# Altium PCB host_board.PcbDoc (part 2 of 3)
Units mm, origin at the board's own origin, x right, y up, seen from the top; angles counter-clockwise.
Board outline 82.44 x 55.58 mm, 4 copper layers (Top Layer, GND, Power, Bottom Layer), stack 1.594 mm thick; 220 components, 249 nets, 1076 pads, 228 vias.
Unrouted connection lines stored in the file: 688.
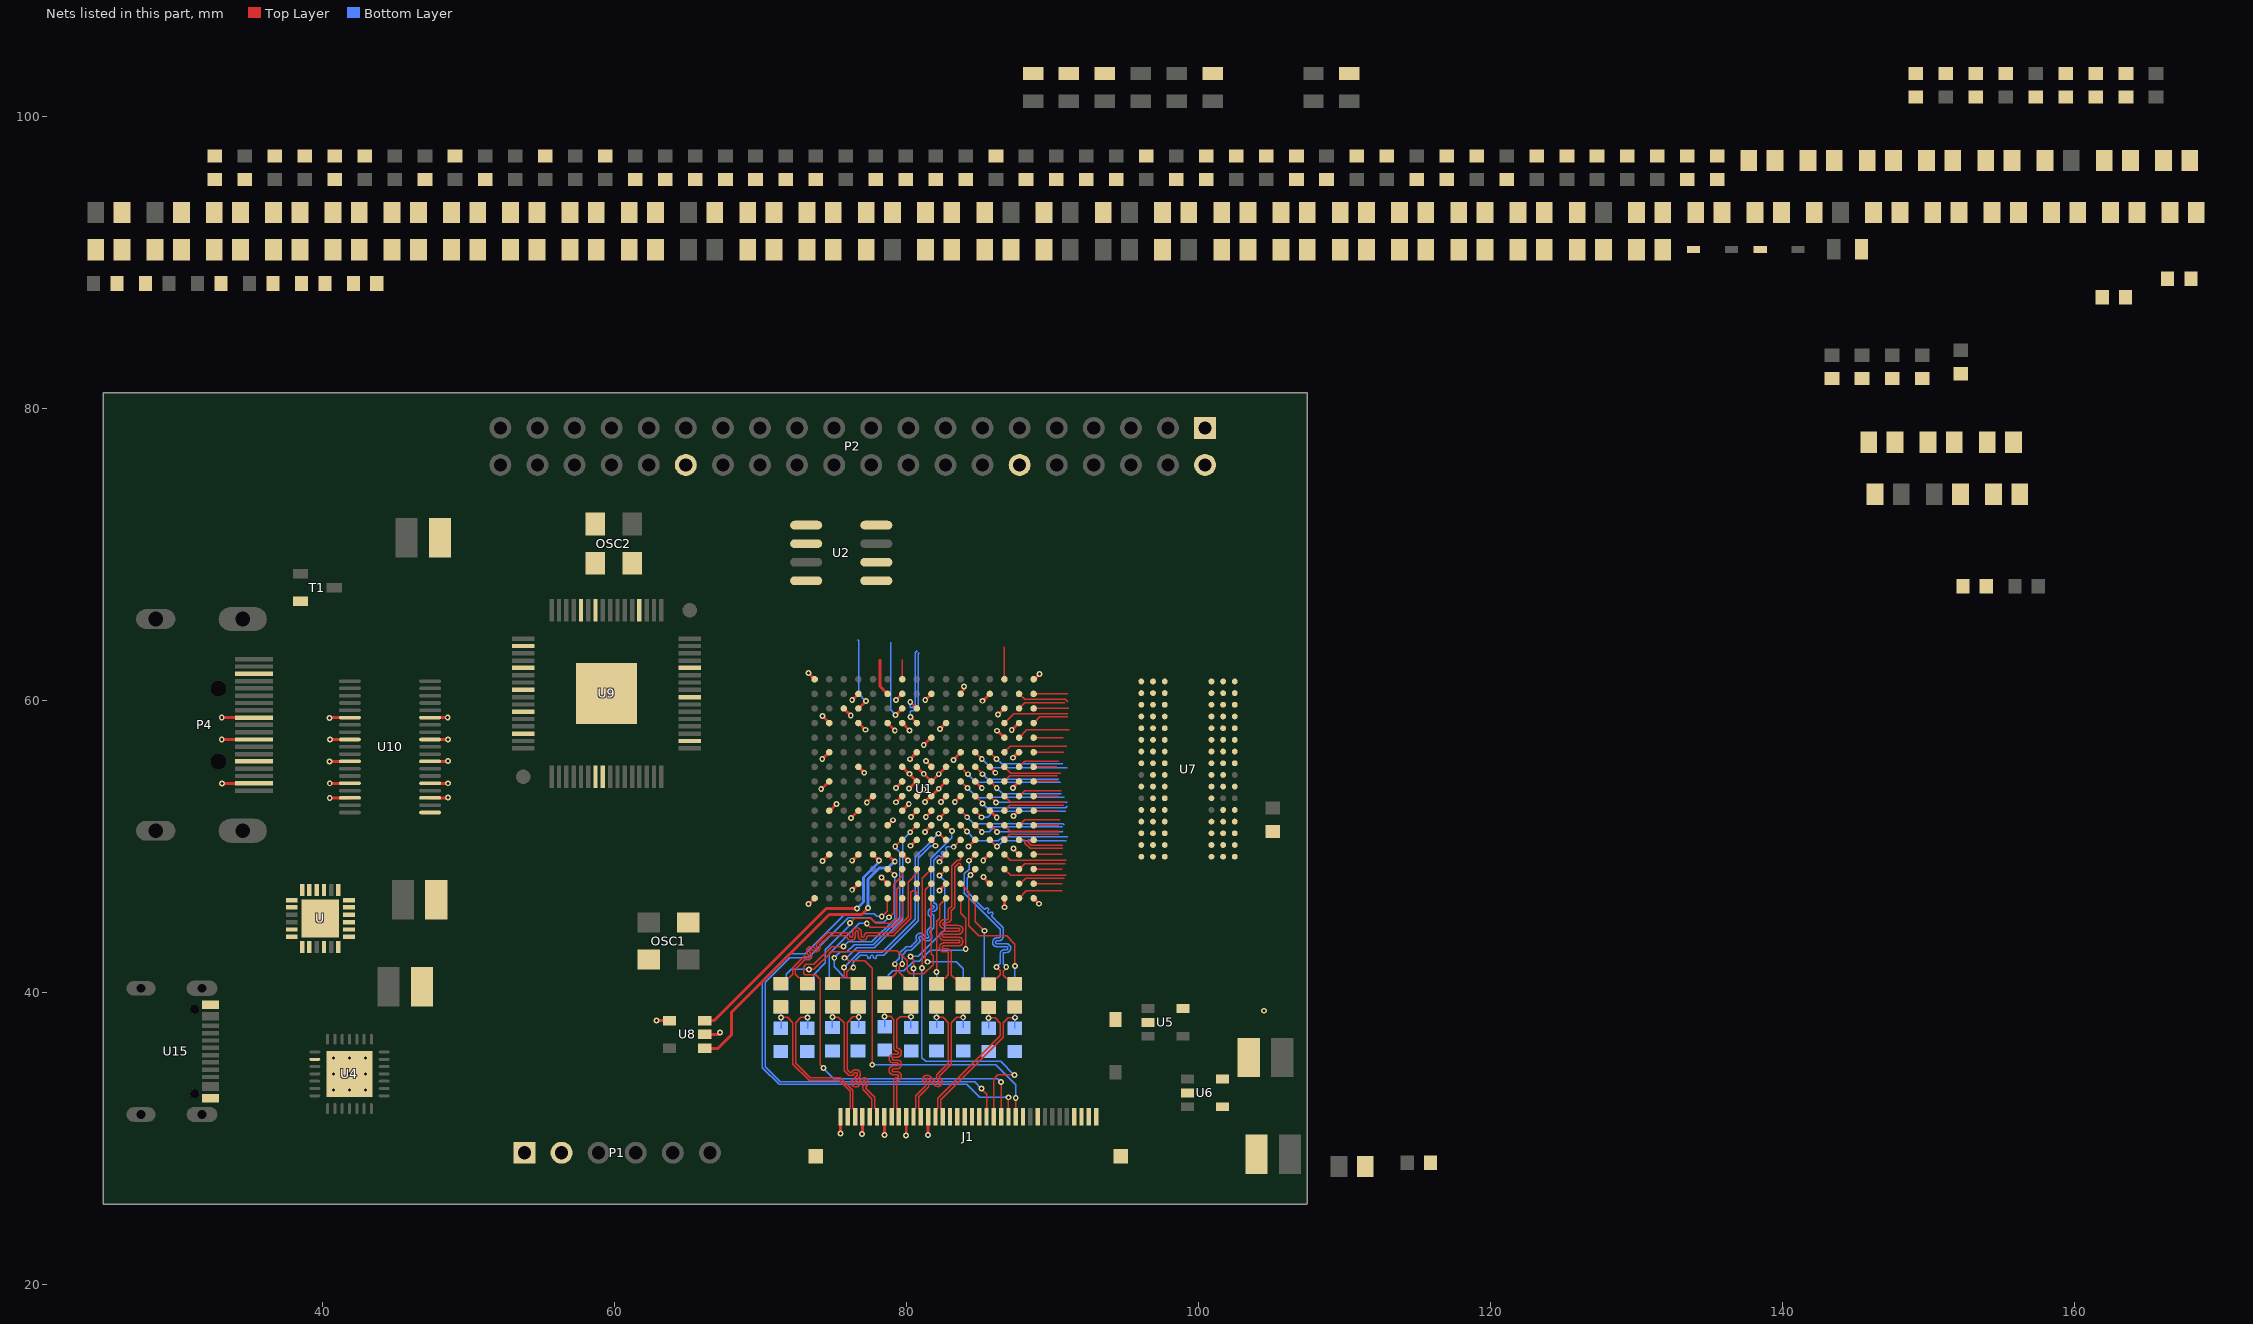
[diagram p4: the nets of this part, all layers, seen from the top]

## Part data
C1 C2 C3 C4 C5 C6 C7 C8 C9 C10 C11 C12 C13 C14 C15 C16 C17 C18 C19 C20 C21 C22 C23 C24 C25 C26 C27 C28 C29 C30 C32 C33 C34 C35 C36 C39 C40 C41 C42 C43 C44 C45 C46 C47 C48 C49 C50 C51 C52 C53 C54 C55 C56 C57 C58 C59 C60 C61 C62 C63 C64 C65 C66 C67 C68 C69 C70 C71 C72 C73 C74 C75 C76 C77 C78 C79 C? C?: library part CC0805_1.5NF_50V_5%_C0G, "Non-polarised capacitor", Case=0805, Manufacturer=GENERIC, Manufacturer1 ComponentHeight=1mm, Manufacturer1 Example=KEMET, Manufacturer1 Part Number=C0805C152J5GACTU, Tolerance=±5%, Voltage=50V, Author="CERN DEM BC", Component Type=Standard, CreateDate=18.11.2015, HelpURL="\\cern.ch\dfs\Applications\Altium\Datasheets\CC0805_C0G_KEMET_(Commercial Grade).pdf", LatestRevisionDate=18.11.2015, Manufacturer Part Number=CC0805_1.5NF_50V_5%_C0G, Mounted=Yes, Part Description="SMD Multilayer Chip Ceramic Capacitor", Part Number=CC0805_1.5NF_50V_5%_C0G, Pin Count=2, Sense=No, SMD=Yes, Socket=No, Status=Preferred, TC=C0G/NP0
D1 D8: "Diode", Case=SOD323, Manufacturer="NXP SEMICONDUCTORS", Power=200mA, Voltage=75V, Author="CERN DEM JLC", Bonding=No, ComponentHeight=1.1mm, Component Type=Standard, CreateDate=01.10.2013, Device=BAS416, HelpURL=\\cern.ch\dfs\Applications\Altium\Datasheets\BAS416.pdf, LatestRevisionDate=01.10.2013, Manufacturer Part Number=BAS416, Mounted=Yes, PackageDescription="Small Outline Diode Flat Lead (SOD-323), 1.70mm W X 1.25mm L X 1.10mm H body,  IPC Medium Density", Part Description="Low-Leakage Diode", Part Number=BAS416, Pin Count=2, PressFit=No, Sense=No, SMD=Yes, Socket=No
D7: "Zener Diode", Case=SOD123, Manufacturer="DIODES INCORPORATED", Power=500mW, Voltage=2V7, Author="CERN DEM JLC", Bonding=No, ComponentHeight=1.45mm, Component Type=Standard, CreateDate=02.03.2015, Device=BZT52C2V7, HelpURL=\\cern.ch\dfs\Applications\Altium\Datasheets\BZT52C2V7.pdf, LatestRevisionDate=02.03.2015, Manufacturer Part Number=BZT52C2V7, Mounted=Yes, PackageDescription="SOD Diode (SOD123); 2.70mm W X 1.55mm L X 1.45mm H body, IPC Medium Density", Part Description="Surface Mount Zener Diode", Part Number=BZT52C2V7, Pin Count=2, PressFit=No, Sense=No, SMD=Yes, Socket=No
J1: "0.5 mm Pitch Easy-On(TM) Type FPC Connector, 2.0 mm Mated Height, Right Angle, ZIF, SMT, Top Contact, 36 Circuits, -40 to 85 degC, ELV and RoHS Compliant, Tape and Reel", Current (Max per Contact)=0.5A, Manufacturer=Molex, Supplier Part Number 1=538-54104-3633, Voltage (Max)=50V, Circuits (Loaded)=36, ComponentLink1Description="Manufacturer URL", ComponentLink1URL=http://www.molex.com/molex/index.jsp, ComponentLink2Description=Datasheet, ComponentLink2URL=http://www.molex.com/webdocs/datasheets/pdf/en-us/0541043633_FFC_FPC_CONNECTORS.pdf, ComponentLink3Description="Package Specification", ComponentLink3URL=http://www.molex.com/pdm_docs/sd/541043633_sd.pdf, Contact Position=Top, Durability (mating cycles max)=20, Entry Angle="90degrees Angle", Mated Height=2.00mm, Material - Metal="Phosphor Bronze", Material - Plating Mating="Silver, Tin-Bismuth", Material - Plating Termination="Silver, Tin-Bismuth", Mounting Technology="Surface Mount", Number of Rows=1, Orientation="Right Angle", PackageDescription="36-Lead FPC Connector, Pitch 0.5 mm", PackageReference=54104-3633, PackageVersion="Rev. C, 04/2014", Packing="Tape and Reel", PartNumber=54104-3633, PCB Locator=No, PCB Retention=None, Pitch - Mating Interface=0.50mm, Pitch - Termination Interface=0.50mm, Polarized to PCB=Yes, RoHS=TRUE, Stackable=No, Supplier 1=Mouser
L1 L2 L3 L4 L5: library part IND_22UH_10%_MURATA-PS_8200, "Inductor With Core", Manufacturer="MURATA POWER SOLUTIONS", Manufacturer Part Number=82223C, Power=320mA, Resistance=0.92R, Tolerance=±10%, Author="CERN DEM JMW", ComponentHeight=2.3mm, Component Type=Standard, CreateDate=07.10.2015, HelpURL=\\cern.ch\dfs\Applications\Altium\Datasheets\IND_MURATA-PS_8200.pdf, LatestRevisionDate=07.10.2015, Mounted=Yes, Part Description="Miniature Surface Mount Power Inductor (8200 Series)", Part Number=IND_22UH_10%_MURATA-PS_8200, Pin Count=2, Sense=No, SMD=Yes, Socket=No, Status=None
LD1 LD2 LD3 LD4 LD5 LD6 LD7 LD8 LD9: library part LED_OSRAM_LSR976, "LED Red 1C 2A", Case=0805, Manufacturer=OSRAM, Manufacturer Part Number=LSR976, Author="CERN DEM JLC", Bonding=No, Color="Super Red", ComponentHeight=0.9mm, Component Type=Standard, CreateDate=18.05.2010, HelpURL=\\cern.ch\dfs\Applications\Altium\Datasheets\LED_OSRAM_LSR976.pdf, LatestRevisionDate=18.05.2010, Mounted=Yes, PackageDescription="Super Red Chip LED, 2-Leads, Body 2 x1.25mm, IPC Medium Density", Part Description="Surface Mount Super Red LED (0805 Case)", Part Number=LED_OSRAM_LSR976, Pin Count=2, PressFit=No, Sense=No, SMD=Yes, Socket=No
OSC1 OSC2: library part OSC_50MHZ_IQD_LFSPXO009592, "Oscillator 4 pins 1=E 2=GND 3=OUT 4=+Vs", Manufacturer="IQD FREQUENCY PRODUCTS", Manufacturer Part Number=LFSPXO009592, Author="CERN DEM JLC", Bonding=No, ComponentHeight=0.95mm, Component Type=Standard, CreateDate=16.03.2010, HelpURL=\\cern.ch\dfs\Applications\Altium\Datasheets\OSC_IQD_LFSPXO009592.pdf, LatestRevisionDate=07.11.2016, Mounted=Yes, PackageDescription="Oscillator, Side Concave, 2.54mm Pitch, 4 Pins, 3.20mm L X 5.00mm W X 1.00mm H, CFPS-69 Series", Part Description="3.3V, ±50ppm,  -40..85°C, CMOS Surface Mount Clock Oscillator, Low Current (CFPS-69 Series)", Part Number=OSC_50MHZ_IQD_LFSPXO009592, Pin Count=4, PressFit=No, Sense=No, SMD=Yes, Socket=No
P1: "Header, 6-Pin", LatestRevisionDate=17-Jul-2002, LatestRevisionNote="Re-released for DXP Platform.", Publisher="Altium Limited"
P2: library part "Header 20X2", "Header, 20-Pin, Dual row", LatestRevisionDate=17-Jul-2002, LatestRevisionNote="Re-released for DXP Platform.", Publisher="Altium Limited"
P4: "EMBOSS PACKAGE HDMI CONN SMT NO-FLANGE T", Package=None, Availability=Unavailable, EU_RoHS_Compliance=Compliant, MF="TE Connectivity", MP=1827059-3, Price=None, SnapEDA_Link=https://www.snapeda.com/parts/1827059-3/TE%20Connectivity%20AMP%20Connectors/view-part/1316486/?ref=snap, TE_purchase_URL=https://www.te.com/usa-en/product-1827059-3.html?te_bu=Cor&te_type=disp&te_campaign=seda_glo_cor-seda-global-disp-prtnr-fy19-seda-model-bom-cta_sma-317_1&elqCampaignId=32493
R1 R1 R1 R1 R1 R2 R2 R2 R2 R2 R3 R3 R3 R3 R3 R4 R4 R4 R4 R4 R5 R5 R5 R5 R5 R6 R6 R6 R6 R6 R7 R8 R9 R10 R11 R12 R13 R14 R15 R16 R17 R18 R19 R20 R21 R22 R23 R24 R25 R26 R27 R28 R29 R30 R31 R32 R33 R34 R35 R36 R37 R38 R39 R40 R41 R42 R43 R44 R45 R46 R47 R48 R49 R50 R51 R52 R53 R54 R55 R56 R57 R58 R59 R60 R61 R62 R63 R64 R65 R66 R67 R68 R69 R70 R71 R72 R73 R74 R75 R76 R77 R78 R79 R80 R81 R82 R?: library part R0603_100K_1%_0.1W_100PPM, "Resistor - 1%", Case=0603, Manufacturer=GENERIC, Manufacturer1 ComponentHeight=0.55mm, Manufacturer1 Example="NIC COMPONENT", Manufacturer1 Part Number=NRC06F1003TRF, Power=0.1W, Tolerance=±1%, Author="CERN DEM JLC", Component Type=Standard, CreateDate=03.12.2007, HelpURL=\\cern.ch\dfs\Applications\Altium\Datasheets\R0603_NIC_NRC.pdf, LatestRevisionDate=13.03.2008, Manufacturer Part Number=R0603_100K_1%_0.1W_100PPM, Mounted=Yes, Part Description="General Purpose Thick Film Chip Resistor", Part Number=R0603_100K_1%_0.1W_100PPM, Pin Count=2, PressFit=No, Sense=No, SMD=Yes, Socket=No, Status=Preferred, TC=±100ppm/°C
T1: "N-CHANNEL MOSFET WITH DIODE", Case=SOT23-3, Manufacturer="FAIRCHILD SEMICONDUCTOR", Author="CERN DEM JLC", Bonding=No, ComponentHeight=1.3mm, Component Type=Standard, CreateDate=20.08.2008, Device=2N7002, HelpURL=\\cern.ch\dfs\Applications\Altium\Datasheets\2N7002.pdf, LatestRevisionDate=07.04.2009, Manufacturer Part Number=2N7002, Mounted=Yes, PackageDescription="SOT23 3-Leads, Pitch 0.95mm - Body 1.3x2.9mm, IPC Medium Density", Part Description="60V 280mA N-Channel Enhancement Mode Field Effect Transistor (FET)", Part Number=2N7002, Pin Count=3, PressFit=No, Sense=No, SMD=Yes, Socket=No
U: "PMIC - Voltage Regulators - Linear + Switching 4 Output Step-Down _Buck_ Synchronous _2_, Linear _LDO_ _2_ 2MHz 24-WQFN _4x4_", Package="WQFN-24 Texas Instruments", Availability=Unavailable, MF="Texas Instruments", MP=LM26480SQ-AA, Price=None, SnapEDA_Link=https://www.snapeda.com/parts/LM26480SQ-AA/Texas%20Instruments/view-part/28484/?ref=snap
U1: "Spartan-6 LX 1.2V FPGA, 186 User I/Os, 256-Ball Fine-Pitch Thin BGA (1.0mm Pitch), Speed Grade 2, Commercial Grade, Pb-Free", Code_JEDEC=MS-034-AAF-1*, ComponentLink1Description="Manufacturer URL", ComponentLink1URL=http://www.xilinx.com/, ComponentLink2Description="Spartan-6 Datasheet", ComponentLink2URL=http://www.xilinx.com/support/documentation/data_sheets/ds160.pdf, ComponentLink3Description="Spartan-6 Documents", ComponentLink3URL=http://www.xilinx.com/support/documentation/spartan-6.htm, DatasheetVersion="ver1.6, Nov-2010", PackageDescription="256-Ball Fine Pitch Thin Ball Grid Array 1.00 mm Pitch (FTG256) - Pb-Free", PackageReference=FTG256, PackageVersion="ver1.3, Oct-2007"
U2: "8 Mb (x1) Serial NOR Flash Memory, 75 MHz, 2.7 to 3.6 V, 8-pin SO8 Narrow (MN), Tube", Manufacturer=Micron, Package="SO8 Narrow", Voltage=2.7V-3.6V, Applications=Embedded, ComponentLink1Description="Manufacturer URL", ComponentLink1URL=http://www.micron.com/, ComponentLink2Description=Datasheet, ComponentLink2URL=http://www.micron.com/~/media/Documents/Products/Data%20Sheet/NOR%20Flash/Serial%20NOR/M25P/M25P80.pdf, ComponentLink3Description="Package Specification", ComponentLink3URL=http://www.micron.com/~/media/Documents/Products/Data%20Sheet/NOR%20Flash/Serial%20NOR/M25P/M25P05A.pdf, DatasheetVersion="Rev. Y", Density=8Mb, Mounting Technology="Surface Mount", PackageDescription="8-Pin SO Narrow, 3.9 X 4.9 mm, Pitch 1.27 mm", PackageReference=MICT-MN-8, PackageVersion="Rev 11", Part Family=M25P, PartNumber=M25P80-VMN6P, Part Status=Production, RoHS=Yes, Speed="75 MHz", Type="Data Storage", Width=x1
U4: "Single-Chip USB to UART Bridge, 1024 Bytes EEPROM, -40 to 85 degC, 28-pin QFN, Tube", Manufacturer="Silicon Labs", Supplier Part Number 1=336-1164-ND, ComponentLink1Description="Manufacturer URL", ComponentLink1URL=http://www.silabs.com/, ComponentLink2Description=Datasheet, ComponentLink2URL=http://www.silabs.com/Support%20Documents/TechnicalDocs/CP2103.pdf, ComponentLink3Description="Package Specification", ComponentLink3URL=http://www.silabs.com/Support%20Documents/TechnicalDocs/C8051F35x.pdf, DatasheetVersion="Rev. 1.0", EEPROM="1024 Bytes", Internal Oscillator=TRUE, Mounting Technology="Surface Mount", PackageDescription="28-Pin Quad-Flat No-Leads Package, Body 5 x 5 mm, Pitch 0.5 mm", PackageReference=QFN-28, PartNumber=CP2103-GM, Sub-Family="USB Bridges", Supplier 1=Digi-Key, Supplier 2=Farnell, Supplier 3=Newark, Supplier 4=Mouser, Supplier Part Number 2=1291538, Supplier Part Number 3=24M1109, Supplier Part Number 4=634-CP2103-GM
U5 U6: "28 V, 400 mA Switch Boost Converter for White LED Applications, 1.8 to 6 V, -40 to 85 degC, 5-pin SOT23 (DBV5), Green (RoHS & no Sb/Br)", Manufacturer="Texas Instruments", Rating=Catalog, Supplier Part Number 1=296-12685-2-ND, Switching Frequency(Max)(kHz)=1000, Code_JEDEC=MO-178, ComponentLink1Description="Manufacturer URL", ComponentLink1URL=http://www.ti.com/, ComponentLink2Description=Datasheet, ComponentLink2URL=http://www.ti.com/general/docs/lit/getliterature.tsp?genericPartNumber=TPS61040&fileType=pdf, ComponentLink3Description="Package Specification", ComponentLink3URL=http://www.ti.com/litv/pdf/mpds018i, DatasheetVersion=SLVS413F, Dimming=TRUE, Eco-Plan="Green (RoHS & no Sb/Br)", Iout(Max)(A)=0.09, Iq(Typ)(mA)=0.028, Mounting Technology="Surface Mount", PackageDescription="5-Pin Plastic Small Outline, Body 1.60 × 2.90 mm, Pitch 0.95 mm", PackageReference=DBV5, PackageVersion=4073253-4/K, PartNumber=TPS61040DBVR, SubFamily="White LED Driver", Supplier 1=Digi-Key, Supplier 2=Digi-Key, Supplier 3=Digi-Key, Supplier 4=Farnell, Supplier 5=Farnell, Supplier 6=Newark, Supplier 7=Mouser, Supplier Part Number 2=296-12685-1-ND, Supplier Part Number 3=296-12685-6-ND, Supplier Part Number 4=1461061, Supplier Part Number 5=1461061RL, Supplier Part Number 6=35K1326, Supplier Part Number 7=595-TPS61040DBVR, Topology=Boost, Vin(Max)(V)=6, Vin(Min)(V)=1.8
U7: "4Gb DDR3-1600 SDRAM, 256Mb x 16, 1.25ns, 1.5V, 0 to 95 degC, 96-Ball FBGA, Pb-Free", Manufacturer=Micron, Op. Temp.="0C to +95C", Package=FBGA, Voltage=1.5V, CL="CL = 11", Clock Rate="800 MHz", ComponentLink1Description="Manufacturer URL", ComponentLink1URL=http://www.micron.com/, ComponentLink2Description=Datasheet, ComponentLink2URL=http://www.micron.com/~/media/Documents/Products/Data%20Sheet/DRAM/4Gb_DDR3_SDRAM.pdf, ComponentLink3Description="Package Specification", ComponentLink3URL=http://www.micron.com/~/media/Documents/Products/Data%20Sheet/DRAM/4Gb_1_35V_DDR3L.pdf, Cycle Time=1.25ns, Data Rate=DDR3-1600, DatasheetVersion=Rev.J, Density=4Gb, Depth=256Mb, Mounting Technology="Surface Mount", PackageDescription="96-Ball Fine-Pitch Ball Grid Array, 14 x 9 mm, Pitch 0.8 mm", PackageReference=MICT-HA-96, PackageVersion=Rev.E, PartNumber=MT41J256M16HA-125, Pin Count=96-ball, RoHS=Yes, Width=x16
U8: "2Kbit, 400kHz, 1.7V, I2C Serial EEPROM, 5-Pin SOT-23, Industrial Temperature, Tape and Reel", Manufacturer=Microchip, Supplier Part Number 1=24AA02HT-I/OT-ND, Code_IPC=SOT23-5, ComponentLink1Description="Manufacturer URL", ComponentLink1URL=http://www.microchip.com/, ComponentLink2Description=Datasheet, ComponentLink2URL=http://ww1.microchip.com/downloads/en/DeviceDoc/22105A.pdf, ComponentLink3Description="Package Specification", ComponentLink3URL=http://www.microchip.com/stellent/groups/techpub_sg/documents/packagingspec/en012702.pdf, DatasheetVersion="revA, Sep-2008", Mounting Technology="Surface Mount", PackageDescription="5-Lead Plastic Small Outline Transistor (OT) [SOT-23]", PackageReference=SOT-23-OT5, PackageVersion="revBB, Aug-2009", PartNumber=24AA02HT-I/OT, Supplier 1=Digi-Key, Supplier 2=Mouser, Supplier Part Number 2=579-24AA02HT-I/OT
U9: "Low Power 165 MHz HDMI Receiver"
U10: "HDMI Receiver Port Protection and Interface Device, 12 Channels, -40 to +85 degC, 38-pin TSSOP (DBT), Green (RoHS & no Sb/Br)", Breakdown Voltage(Min)(V)=9, Differential Capacitance(pF)=0.05, IO Capacitance(Typ)(pF)=0.9, Manufacturer="Texas Instruments", Supplier Part Number 1=296-23617-2-ND, Code_JEDEC=MO-153, ComponentLink1Description=Datasheet, ComponentLink1URL=http://www.ti.com/general/docs/lit/getliterature.tsp?genericPartNumber=TPD12S520&fileType=pdf, ComponentLink2Description="URL Link1", ComponentLink2URL=SamplesURL:http://www.ti.com/product/tpd12s520#samples, DatasheetVersion=SLVS640C, Eco-Plan="Green (RoHS & no Sb/Br)", IEC 61000-4-2 Contact(+/- kV)=8, IO Leakage Current(nA)=0.05, Mounting Technology="Surface Mount", PackageDescription="38-Pin Plastic Small Outline 0.5 mm Pitch", PackageReference=DBT38, PackageVersion="revI, Mar-2011", PartNumber=TPD12S520DBTR, SubFamily="ESD Solution", Supplier 1=Digi-Key, Supplier 2=Digi-Key, Supplier 3=Digi-Key, Supplier 4=Newark, Supplier 5=Mouser, Supplier Part Number 2=296-23617-1-ND, Supplier Part Number 3=296-23617-6-ND, Supplier Part Number 4=85M0176, Supplier Part Number 5=595-TPD12S520DBTR
U15: "USB-C _USB TYPE-C_ USB 2.0 Receptacle Connector 24 _16+8 Dummy_ Position Surface Mount, Right Angle; Through Hole", Package=None, Availability=Unavailable, MF=GCT, MP=USB4105-GF-A, Price=None, SnapEDA_Link=https://www.snapeda.com/parts/USB4105-GF-A/Global%20Connector%20Technology/view-part/4423780/?ref=snap

## Via types
v1: diameter 0.4, hole 0.2, Top Layer to Bottom Layer, tented both sides, 219 vias
v2: diameter 0.5, hole 0.2, Top Layer to Bottom Layer, 9 vias

## Nets (pads, with @x,y where several pads share a name; then routed paths per layer and width w, separated by ;. In a path a pad name is that pad's centre, name@x,y a point inside that pad or via, vN(x,y) a via of type N, cw(c..) or ccw(c..) an arc to the next point about the centre after c; other vN are vias at no path point)
1P5: C1.2 C2.2 C6.2 C7.2 C8.2 C9.2 C10.2 C11.2 C12.2 C13.2 R7.2 U7.A1 U7.A8 U7.B2 U7.C1 U7.C9 U7.D2 U7.D9 U7.E9 U7.F1 U7.G7 U7.H2 U7.H9 U7.K2 U7.K8 U7.N1 U7.N9 U7.R1 U7.R9
1V2: C50.2 C51.2 C52.2 C53.2 LD3.2 R18.1 U1.G7 U1.G9 U1.H8 U1.H10 U1.J7 U1.J9 U1.K8 U1.K10 U.20 | length 6.6
  Top Layer w0.2: v1(79.275,53.05) U1.H10@79.7,53.475 ; U1.K10@79.7,55.475 U1.J9@80.7,54.475 80.65,54.475 v1(80.175,54) ; v1(80.3,52.05) 80.7,52.45 U1.G9@80.7,52.475 ; v1(81.25,53.075) 81.65,53.475 U1.H8@81.7,53.475 U1.J7@82.7,54.475 ; v1(81.325,55.875) 81.7,55.5 U1.K8@81.7,55.475 ; v1@82.25,51.975 82.7,52.425 U1.G7@82.7,52.475
  other v1: 82.252,51.975 82.2,53.975 80.2,55
1V5: C57.2 C58.2 C59.2 LD7.2 R20.1 U1.D2 U1.G4 U1.J2 U1.K4 U1.N2 U.23 | length 3
  Top Layer w0.2: U1.G4@85.7,52.475 v1(86.175,52) ; U1.K4@85.7,55.475 v1@86.1,55.075 ; v1(87.2,58) 87.675,58.475 U1.N2@87.7,58.475 ; v1@87.3,54.075 U1.J2@87.7,54.475 ; v1@87.325,49.85 U1.D2@87.7,49.475
  other v1: 87.325,49.875 87.275,54.025 86.075,55.075
1V8: C20.2 C22.2 C27.2 C40.2 C41.2 C42.2 C67.2 C68.2 C69.2 C70.2 C71.2 C72.2 J1.33 J1.34 L1.2 L5.2 LD6.2 R23.2 R47.2 R48.2 U1.B4 U1.B9 U1.B13 U1.D7 U1.D10 U8.4 U9.2 U9.14 U9.24 U9.40 U9.52 U9.60 U.19 | length 3.3
  Top Layer w0.2: v1(62.875,38.1) U8.4@63.775,38.1 ; v1@76.281,47.056 U1.B13@76.7,47.475 ; U1.D10@79.7,49.475 v1(80.1,49.075) ; v1@82.25,49.025 U1.D7@82.7,49.475 ; v1@85.275,47.9 U1.B4@85.7,47.475
  other v1: 76.275,47.056 85.275,47.925 82.25,48.975
3V3: C19.2 C21.2 C26.2 C28.2 C34.2 C39.2 C43.2 C44.2 C45.2 C46.2 C47.2 C48.2 C49.2 C54.2 C55.2 C56.2 C60.2 C61.2 C74.2 C75.2 C76.2 C77.2 C78.2 C79.2 J1.35 J1.36 L2.2 L3.1 L4.1 LD5.2 OSC1.4 OSC2.4 P1.2 R15.1 R16.2 R22.2 R34.1 R35.2 R36.1 R37.2 R38.2 R40.2 R41.2 R43.2 R45.2 R46.2 R50.2 R51.2 R52.2 R53.2 R58.2 R60.1 R63.1 R64.1 R65.1 R66.1 R67.1 R68.1 R69.1 R71.2 R72.2 R74.2 U1.D15 U1.E5 U1.F8 U1.F11 U1.G10 U1.G13 U1.H6 U1.J10 U1.J15 U1.K13 U1.L6 U1.L9 U1.N7 U1.N10 U1.N15 U1.R4 U1.R8 U1.R13 U2.8 U5.5 U6.4 U6.5 U9.5 U9.8 U9.11 U9.23 U9.34 U9.44 U.24 | length 11.7
  Top Layer w0.2: v1(74.15,53.95) 74.175,53.95 U1.J15@74.7,54.475 ; v1(74.25,49.025) U1.D15@74.7,49.475 ; v1(74.25,58.95) 74.725,58.475 U1.N15@74.7,58.475 ; v1(76.189,51.975) 76.7,52.486 U1.G13@76.7,52.475 ; v1@76.225,60 U1.R13@76.7,60.475 ; U1.K13@76.7,55.475 v1(77.1,55.075) ; U1.F11@78.7,51.475 78.725,51.475 78.725,51.487 v1@79.063,51.825 ; v1(79.275,54.025) 79.275,54.05 U1.J10@79.7,54.475 ; U1.G10@79.7,52.475 v1@80.175,52.95 ; U1.N10@79.7,58.475 v1(80.2,57.975) ; v1(80.225,56) U1.L9@80.7,56.475 ; v1@81.25,60.025 U1.R8@81.7,60.475 ; v1@81.275,51.05 U1.F8@81.7,51.475 ; v1@82.275,58 82.275,58.05 U1.N7@82.7,58.475 ; v1(83.2,55.95) 83.7,56.45 U1.L6@83.7,56.475 ; v1(83.3,53.075) U1.H6@83.7,53.475 ; v1@84.275,50.05 U1.E5@84.7,50.475 ; v1(85.2,60) 85.225,60 U1.R4@85.7,60.475
  other v1: 84.25,50.025 81.25,51.025 79.075,51.825 80.15,52.925 82.277,58.075 76.275,60.05 81.275,60.05
5V: C65.2 R54.2 R55.2 R56.2 U10.1
5V_IN: C17.2 C18.2 C24.2 C25.2 D1.1 D8.1 LD4.2 R24.2 U.1 U.6 U.7 U.10 U.12 U.13 U.16 U.17
B1_FB: C20.1 R23.1 R26.2 U.8
B2_FB: C19.1 C23.2 R22.1 R25.2 U.11
CFG_CCLK: R40.1 R44.2 U1.R11 U2.6 | length 2.5
  Top Layer w0.2: 78.175,62.775 78.175,61 U1.R11@78.7,60.475
CFG_CS: R39.1 R41.1 U1.T3 U2.1 | length 2.2
  Top Layer w0.1: U1.T3@86.7,61.475 86.7,63.71
CFG_DONE: LD1.2 R38.1 U1.P13 | length 5.2
  Top Layer w0.2: U1.P13@76.7,59.475 76.712,59.475 v1(77.213,59.975)
  Bottom Layer w0.1: 76.65,64.175 76.713,64.112 76.713,60.475 v1(77.213,59.975)
CFG_MISO: U1.P10 U2.2 | length 5.8
  Top Layer w0.2: v1(79.25,59.025) U1.P10@79.7,59.475
  Bottom Layer w0.1: 78.9,64.025 78.9,59.375 79.2,59.075 79.25,59.075 v1(79.25,59.025)
CFG_MOSI: U1.T10 U2.5 | length 1.3
  Top Layer w0.1: U1.T10@79.7,61.475 79.7,62.8
CLK_25: OSC2.3 U9.58
DDR_A0: U1.K5 U7.N3 | length 6.1
  Top Layer w0.1: U1.K5@84.7,55.475 v1(85.2,54.975)
  Bottom Layer w0.1: v1(85.2,54.975) 85.55,54.625 90.425,54.625
DDR_A1: U1.K6 U7.P7 | length 7.3
  Top Layer w0.1: U1.K6@83.7,55.475 v1(84.2,54.975)
  Bottom Layer w0.1: v1(84.2,54.975) 84.75,54.425 90.5,54.425 90.525,54.45
DDR_A2: U1.D1 U7.P3 | length 2
  Top Layer w0.1: U1.D1@88.7,49.475 90.675,49.475
DDR_A3: U1.L4 U7.N2 | length 5.3
  Top Layer w0.1: U1.L4@85.7,56.475 v1(86.15,56.025)
  Bottom Layer w0.1: v1(86.15,56.025) 86.5,55.675 90.7,55.675
DDR_A4: U1.G5 U7.P8 | length 6.6
  Top Layer w0.1: U1.G5@84.7,52.475 v1@85.15,52.025
  Bottom Layer w0.1: v1(85.125,52.025) 85.55,52.025 85.975,52.45 90.9,52.45
DDR_A5: U1.H4 U7.P2 | length 5.5
  Top Layer w0.1: U1.H4@85.7,53.475 86.125,53.05 v1(86.125,53.042)
  Bottom Layer w0.1: v1(86.125,53.042) 91.008,53.042
DDR_A6: U1.H3 U7.R8 | length 4.3
  Top Layer w0.1: U1.H3@86.7,53.475 87.125,53.05 90.833,53.05
DDR_A7: U1.D3 U7.R2 | length 4.4
  Top Layer w0.1: U1.D3@86.7,49.475 87.1,49.075 90.925,49.075
DDR_A8: U1.B2 U7.T8 | length 3.3
  Top Layer w0.1: U1.B2@87.7,47.475 87.795,47.475 88.17,47.85 90.8,47.85
DDR_A9: U1.A2 U7.R3 | length 3.2
  Top Layer w0.1: U1.A2@87.7,46.475 88.2,46.975 90.65,46.975
DDR_A10: U1.G6 U7.L7 | length 7.5
  Top Layer w0.1: U1.G6@83.7,52.475 v1(84.15,52.025)
  Bottom Layer w0.1: v1(84.15,52.025) 84.6,51.575 90.708,51.575 90.783,51.5 90.8,51.5
DDR_A11: U1.E3 U7.R7 | length 3.9
  Top Layer w0.1: U1.E3@86.7,50.475 87.075,50.85 90.425,50.85
DDR_A12: U1.F3 U7.N7 | length 3.9
  Top Layer w0.1: U1.F3@86.7,51.475 87.1,51.075 90.45,51.075
DDR_A13: U1.F6 U7.T3 | length 7.9
  Top Layer w0.1: U1.F6@83.7,51.475 v1@84.15,51.025
  Bottom Layer w0.1: v1(84.125,51.05) 84.75,50.425 86.292,50.425 86.567,50.7 91.025,50.7
DDR_A14: U1.F5 U7.T7 | length 6.3
  Top Layer w0.1: U1.F5@84.7,51.475 v1(85.15,51.025)
  Bottom Layer w0.1: v1(85.15,51.025) 85.65,51.025 86,51.375 90.625,51.375 90.65,51.35
DDR_BA0: U1.C3 U7.M2 | length 4.4
  Top Layer w0.1: U1.C3@86.7,48.475 87.125,48.05 90.925,48.05
DDR_BA1: U1.C2 U7.N8 | length 3.3
  Top Layer w0.1: U1.C2@87.7,48.475 88.075,48.85 90.85,48.85
DDR_BA2: U1.B1 U7.M3 | length 2
  Top Layer w0.1: U1.B1@88.7,47.475 90.675,47.475
DDR_CAS: U1.H5 U7.K3 | length 6.7
  Top Layer w0.1: U1.H5@84.7,53.475 v1(85.2,52.975)
  Bottom Layer w0.1: v1(85.2,52.975) 85.5,52.675 90.9,52.675 91,52.775
DDR_CKE: R9.2 U1.F4 U7.K9 | length 5.2
  Top Layer w0.1: U1.F4@85.7,51.475 85.75,51.475 v1(86.2,51.025)
  Bottom Layer w0.1: v1(86.2,51.025) 90.675,51.025 90.7,51.05
DDR_CLK_N: R12.1 U1.E1 U7.K7 | length 3
  Top Layer w0.1: U1.E1@88.7,50.475 88.359,50.475 88.3,50.416 88.3,50.334 88.534,50.1 89.598,50.1 89.607,50.109 90.709,50.109
DDR_CLK_P: R12.2 U1.E2 U7.J7 | length 3.3
  Top Layer w0.1: U1.E2@87.7,50.475 88.041,50.475 88.1,50.416 88.1,50.251 88.451,49.9 89.681,49.9 89.689,49.909 90.709,49.909
DDR_CS: R10.2 U7.L2
DDR_D0: U1.G3 U7.E3 | length 4.2
  Top Layer w0.1: U1.G3@86.7,52.475 87.075,52.85 90.75,52.85
DDR_D1: U1.J3 U7.F7 | length 3.8
  Top Layer w0.1: U1.J3@86.7,54.475 87.075,54.85 90.3,54.85
DDR_D2: U1.G1 U7.F2 | length 1.7
  Top Layer w0.1: U1.G1@88.7,52.475 90.4,52.475
DDR_D3: U1.K1 U7.F8 | length 1.6
  Top Layer w0.1: U1.K1@88.7,55.475 90.275,55.475
DDR_D4: U1.F2 U7.H3 | length 2.9
  Top Layer w0.1: U1.F2@87.7,51.475 88.075,51.85 90.475,51.85
DDR_D5: U1.K2 U7.H8 | length 2.9
  Top Layer w0.1: U1.K2@87.7,55.475 88.075,55.85 90.425,55.85
DDR_D6: U1.F1 U7.G2 | length 1.7
  Top Layer w0.1: U1.F1@88.7,51.475 90.425,51.475
DDR_D7: U1.J1 U7.H7 | length 1.7
  Top Layer w0.1: U1.J1@88.7,54.475 90.35,54.475
DDR_D8: U1.R1 U7.D7 | length 2.3
  Top Layer w0.1: U1.R1@88.7,60.475 91.025,60.475
DDR_D9: U1.M2 U7.C3 | length 3.6
  Top Layer w0.1: U1.M2@87.7,57.475 88.225,58 91.125,58
DDR_D10: U1.R2 U7.C8 | length 3.6
  Top Layer w0.1: U1.R2@87.7,60.475 87.7,60.45 87.725,60.45 88.075,60.1 90.875,60.1 91.025,59.95
DDR_D11: U1.L3 U7.C2 | length 4.4
  Top Layer w0.1: U1.L3@86.7,56.475 87.1,56.875 90.975,56.875
DDR_D12: U1.P1 U7.A7 | length 2.4
  Top Layer w0.1: U1.P1@88.7,59.475 91.1,59.475
DDR_D13: U1.L1 U7.A2 | length 2.1
  Top Layer w0.1: U1.L1@88.7,56.475 90.775,56.475
DDR_D14: U1.P2 U7.B8 | length 3.3
  Top Layer w0.1: U1.P2@87.7,59.475 88.075,59.85 90.825,59.85
DDR_D15: U1.M1 U7.A3 | length 2
  Top Layer w0.1: U1.M1@88.7,57.475 90.725,57.475
DDR_DM0: U1.J4 U7.E7 | length 5.3
  Top Layer w0.1: U1.J4@85.7,54.475 85.725,54.475 v1(86.175,54.025)
  Bottom Layer w0.1: v1(86.175,54.025) 86.575,53.625 90.6,53.625
DDR_DM1: U1.K3 U7.D3 | length 4
  Top Layer w0.1: U1.K3@86.7,55.475 87.125,55.05 90.55,55.05
DDR_LDQS0: U1.H2 U7.F3 | length 3.1
  Top Layer w0.1: U1.H2@87.7,53.475 88.075,53.85 90.6,53.85
DDR_LDQS1: U1.H1 U7.G3 | length 1.7
  Top Layer w0.1: U1.H1@88.7,53.475 90.375,53.475
DDR_ODT: R30.2 U1.L5 U7.K1 | length 6.8
  Top Layer w0.1: U1.L5@84.7,56.475 v1@85.175,56
  Bottom Layer w0.1: v1(85.15,56.025) 85.75,55.425 91,55.425
DDR_RAS: U1.J6 U7.J3 | length 7.6
  Top Layer w0.1: U1.J6@83.7,54.475 83.725,54.475 v1(84.175,54.025)
  Bottom Layer w0.1: v1(84.175,54.025) 84.825,53.375 85.539,53.375 85.556,53.392 90.808,53.392
DDR_RESETN: R11.2 U1.E4 U7.T2 | length 5.6
  Top Layer w0.1: U1.E4@85.7,50.475 86.175,50 v1@86.175,49.975
  Bottom Layer w0.1: v1(86.2,50.011) 86.614,50.425 90.925,50.425
DDR_UDQS0: U1.N3 U7.C7 | length 4.6
  Top Layer w0.1: U1.N3@86.7,58.475 87.325,59.1 91.05,59.1
DDR_UDQS1: U1.N1 U7.B7 | length 2.5
  Top Layer w0.1: U1.N1@88.7,58.475 89.125,58.9 91.05,58.9
DDR_VREF: C2.1 C3.2 C4.2 C5.2 C30.1 C?.1@32.595,90.885 R7.1 R8.2 U1.A3 U1.M3 U7.H1 U7.M8 | length 1.3
  Top Layer w0.2: v1(86.2,57.95) 86.225,57.95 U1.M3@86.7,57.475 ; v1(86.7,45.862) U1.A3@86.7,46.475
DDR_WE: U1.C1 U7.L3 | length 2
  Top Layer w0.1: U1.C1@88.7,48.475 90.675,48.475
DPHY_Designator2_N: J1.15 R4.1@87.415,37.575 R5.2@87.415,39.025 R6.2@87.415,39.025 | length 10.7
  Top Layer w0.1: J1.15@82.475,31.5 82.475,31.95 82.325,32.1 82.325,32.683 86.615,36.973 86.615,37.94 86.975,38.3 v1(87.415,38.3)
  Bottom Layer w0.1: R4.1@87.415,37.575 v1(87.415,38.3) R6.2@87.415,39.025
DPHY_Designator2_P: J1.14 R1.1@85.615,39 R2.2@85.615,39 R3.2@85.615,37.575 | length 10.7
  Top Layer w0.1: J1.14@81.975,31.5 81.975,31.95 82.125,32.1 82.125,32.766 86.415,37.056 86.415,37.935 86.056,38.294 85.621,38.294 v1(85.615,38.287)
  Bottom Layer w0.1: R3.2@85.615,37.575 v1(85.615,38.287) R1.1@85.615,39
DPHY_Designator3_N: J1.12 R4.1@83.875,37.625 R5.2@83.85,39.025 R6.2@83.875,39.025 | length 11.4
  Top Layer w0.1: J1.12@80.975,31.5 80.975,31.95 80.825,32.1 80.825,32.872 81.428,33.475 ccw(c81.216,33.687) 81.516,33.687 ccw(c81.216,33.687) 81.428,33.899 81.341,33.986 cw(c81.412,34.057) 81.482,34.128 81.94,33.67 ccw(c82.152,33.883) 82.452,33.883 ccw(c82.152,33.883) 82.364,34.095 82.277,34.182 cw(c82.347,34.253) 82.277,34.323 83.063,35.109 83.063,37.962 83.425,38.325 v1(83.875,38.325)
  Bottom Layer w0.1: R4.1@83.875,37.625 v1(83.875,38.325) R6.2@83.875,39.025
DPHY_Designator3_P: J1.11 R1.1@82.05,39.025 R2.2@82.075,39.025 R3.2@82.05,37.625 | length 11.4
  Top Layer w0.1: J1.11@80.475,31.5 80.475,31.95 80.625,32.1 80.625,32.955 81.287,33.616 ccw(c81.216,33.687) 81.316,33.687 ccw(c81.216,33.687) 81.287,33.758 81.199,33.845 cw(c81.412,34.057) 81.624,34.269 82.081,33.812 ccw(c82.152,33.883) 82.252,33.883 ccw(c82.152,33.883) 82.222,33.953 82.135,34.041 cw(c82.347,34.253) 82.135,34.465 82.863,35.192 82.863,37.962 82.5,38.325 v1(82.05,38.325)
  Bottom Layer w0.1: R3.2@82.05,37.625 v1(82.05,38.325) R1.1@82.05,39.025
DPHY_Designator4_N: J1.9 R4.1@80.325,37.625 R5.2@80.275,39.025 R6.2@80.3,39.05 | length 11.5
  Top Layer w0.1: 79.325,36.223 79.325,38.15 79.55,38.375 80.288,38.375 v1(80.3,38.362) ; 79.348,34 ccw(c79.348,34.3) 79.35,34 ; 79.348,36.2 cw(c79.348,35.9) 79.648,35.9 cw(c79.348,35.9) 79.348,35.6 79.102,35.6 ccw(c79.102,35.5) 79.102,35.4 79.348,35.4 cw(c79.348,35.1) 79.648,35.1 cw(c79.348,35.1) 79.348,34.8 79.102,34.8 ccw(c79.102,34.7) 79.102,34.6 79.348,34.6 cw(c79.348,34.3) 79.648,34.3 cw(c79.348,34.3) 79.35,34 ; J1.9@79.475,31.5 79.475,31.95 79.325,32.1 79.325,33.975 79.35,34
  Bottom Layer w0.1: R6.2@80.3,39.05 80.3,37.65 R4.1@80.325,37.625
DPHY_Designator4_P: J1.8 R1.1@78.5,39.075 R2.2@78.5,39.075 R3.2@78.495,37.675 | length 11.1
  Top Layer w0.1: v1(78.495,38.387) 78.904,38.387 79.125,38.166 79.125,36.223 ccw(c79.348,36.223) 79.348,36 cw(c79.348,35.9) 79.448,35.9 cw(c79.348,35.9) 79.348,35.8 79.102,35.8 ccw(c79.102,35.5) 79.102,35.2 79.348,35.2 cw(c79.348,35.1) 79.448,35.1 cw(c79.348,35.1) 79.348,35 79.102,35 ccw(c79.102,34.7) 79.102,34.4 79.348,34.4 cw(c79.348,34.3) 79.448,34.3 cw(c79.348,34.3) 79.348,34.2 ccw(c79.348,33.977) 79.125,33.977 79.125,32.1 78.975,31.95 J1.8@78.975,31.5
  Bottom Layer w0.1: R3.2@78.495,37.675 78.5,37.68 R1.1@78.5,39.075
DPHY_Designator5_N: J1.6 R4.1@76.675,37.625 R5.2@76.675,39.04 R6.2@76.725,39.05 | length 11.7
  Top Layer w0.1: v1(76.725,38.35) 76.325,38.35 75.925,37.95 75.925,34.739 76.094,34.569 ccw(c76.165,34.64) 76.236,34.569 76.323,34.657 cw(c76.535,34.445) 76.835,34.445 cw(c76.535,34.445) 76.747,34.232 76.44,33.925 ccw(c76.511,33.854) 76.581,33.784 76.889,34.091 cw(c77.101,33.879) 77.401,33.879 cw(c77.101,33.879) 77.313,33.667 77.226,33.579 ccw(c77.296,33.509) 77.226,33.438 77.825,32.839 77.825,32.1 77.975,31.95 J1.6@77.975,31.5
  Bottom Layer w0.1: R4.1@76.675,37.625 76.725,37.675 R6.2@76.725,39.05
DPHY_Designator5_P: J1.5 R1.1@74.925,39.05 R2.2@74.95,39.05 R3.2@74.925,37.625 | length 11.7
  Top Layer w0.1: v1(74.925,38.338) 74.931,38.344 75.331,38.344 75.725,37.95 75.725,34.656 75.953,34.428 ccw(c76.165,34.64) 76.377,34.428 76.465,34.515 cw(c76.535,34.445) 76.635,34.445 cw(c76.535,34.445) 76.606,34.374 76.299,34.066 ccw(c76.511,33.854) 76.723,33.642 77.03,33.95 cw(c77.101,33.879) 77.201,33.879 cw(c77.101,33.879) 77.172,33.808 77.084,33.721 ccw(c77.296,33.509) 77.084,33.297 77.625,32.756 77.625,32.1 77.475,31.95 J1.5@77.475,31.5
  Bottom Layer w0.1: R3.2@74.925,37.625 v1(74.925,38.338) R1.1@74.925,39.05
DPHY_Designator6_N: J1.3 R4.1@73.2,37.575 R5.2@73.2,39.05 R6.2@73.225,39.025 | length 11.8
  Top Layer w0.1: v1(73.225,38.313) 72.763,38.313 72.412,37.962 72.412,35.192 73.405,34.2 75.458,34.2 76.325,33.333 76.325,32.1 76.475,31.95 J1.3@76.475,31.5
  Bottom Layer w0.1: R4.1@73.2,37.575 73.225,37.6 v1(73.225,38.313) R6.2@73.225,39.025
DPHY_Designator6_P: J1.2 R1.1@71.4,39.025 R2.2@71.375,39.05 R3.2@71.375,37.575 | length 11.8
  Top Layer w0.1: v1(71.4,38.312) 71.862,38.313 72.212,37.963 72.212,35.109 73.322,34 75.375,34 76.125,33.25 76.125,32.1 75.975,31.95 J1.2@75.975,31.5
  Bottom Layer w0.1: R3.2@71.375,37.575 71.4,37.6 v1(71.4,38.312) R1.1@71.4,39.025
DPHY_HS0_N: R5.1@73.2,40.65 U1.A9 | length 15.4
  Top Layer w0.1: R5.1@73.2,40.65 72.8,41.05 72.625,41.05 72.387,41.288 72.387,41.625 73.053,42.291 ccw(c73.204,42.55) 73.504,42.55 ccw(c73.204,42.55) 73.416,42.762 73.383,42.795 cw(c73.454,42.866) 73.525,42.937 73.558,42.904 ccw(c73.77,43.116) 74.07,43.116 ccw(c73.77,43.116) 74.029,43.267 74.687,43.925 75.877,43.925 ; 75.9,43.902 ccw(c76.2,43.902) 76.5,43.902 76.5,44.148 cw(c76.6,44.148) 76.7,44.148 76.7,43.902 ccw(c77,43.902) 77.3,43.902 ; 77.323,43.925 79.108,43.925 79.291,44.109 79.366,44.184 80.108,44.925 80.3,45.117 80.3,46.875 80.425,47 80.575,47 80.7,46.875 U1.A9@80.7,46.475
DPHY_HS0_P: R2.1@71.375,40.65 U1.C9 | length 16.5
  Top Layer w0.1: R2.1@71.375,40.65 71.775,41.05 71.95,41.05 72.187,41.287 72.187,41.708 72.959,42.479 cw(c73.046,42.392) 73.134,42.479 ccw(c73.204,42.55) 73.304,42.55 ccw(c73.204,42.55) 73.275,42.621 73.242,42.654 cw(c73.454,42.866) 73.666,43.078 73.699,43.045 ccw(c73.77,43.116) 73.87,43.116 ccw(c73.77,43.116) 73.841,43.187 cw(c73.928,43.274) 73.841,43.361 74.605,44.125 75.877,44.125 cw(c75.877,43.902) 76.1,43.902 ccw(c76.2,43.902) 76.3,43.902 76.3,44.148 cw(c76.6,44.148) 76.9,44.148 76.9,43.902 ccw(c77,43.902) 77.1,43.902 cw(c77.323,43.902) 77.323,44.125 79.025,44.125 79.15,44.25 79.966,45.066 80.1,45.2 80.1,46.875 80.1,47.575 80.7,48.175 U1.C9@80.7,48.475
DPHY_HS1_N: R5.1@76.675,40.64 U1.E8 | length 14.7
  Top Layer w0.1: v1(76.35,41.725) 76.293,41.668 76.132,41.668 75.915,41.45 75.915,41.099 75.973,41.04 76.275,41.04 R5.1@76.675,40.64 ; U1.E8@81.7,50.475 81.7,50.412 81.975,50.137 v1(81.975,50.075)
  Bottom Layer w0.1: v1@76.35,41.775 76.35,42.1 76.825,42.575 77,42.575 77.125,42.575 77.225,42.575 cw(c77.225,42.475) 77.325,42.475 77.325,42.452 ccw(c77.425,42.452) 77.425,42.352 ccw(c77.425,42.452) 77.525,42.452 77.525,42.475 cw(c77.625,42.475) 77.625,42.575 cw(c77.625,42.475) 77.725,42.475 77.725,42.452 ccw(c77.825,42.452) 77.825,42.352 ccw(c77.825,42.452) 77.925,42.452 77.925,42.475 cw(c78.025,42.475) 78.025,42.575 78.125,42.575 78.325,42.575 78.425,42.575 80.8,44.95 80.8,49.225 81.65,50.075 v1(81.975,50.075)
DPHY_HS1_P: R2.1@74.95,40.65 U1.E7 | length 15.1
  Top Layer w0.1: R2.1@74.95,40.65 75.34,41.04 75.656,41.04 75.715,41.099 v1(75.715,41.747) ; v1(82.175,50.9) 82.225,50.9 82.65,50.475 U1.E7@82.7,50.475
  Bottom Layer w0.1: v1(75.715,41.747) 76.209,42.241 76.742,42.775 78.342,42.775 80.6,45.033 80.6,49.325 81.5,50.225 v1(82.175,50.9)
DPHY_HS2_N: R5.1@80.275,40.625 U1.E6 | length 14.3
  Top Layer w0.1: v1@79.7,42.1 v1(79.7,41.975) 79.498,41.773 79.498,41.402 R5.1@80.275,40.625 ; v1(83.225,50) U1.E6@83.7,50.475 U1.E6@83.7,50.57
  Bottom Layer w0.1: v1@79.7,42.1 79.7,42.603 ; 79.725,42.625 80.025,42.925 80.333,42.925 80.87,43.463 ccw(c80.749,43.584) 80.921,43.584 ccw(c80.749,43.584) 80.87,43.705 cw(c80.941,43.776) 81.012,43.847 81.221,43.638 ccw(c81.433,43.85) 81.733,43.85 ccw(c81.433,43.85) 81.645,44.062 ; 81.628,44.079 cw(c81.699,44.15) 81.628,44.22 81.862,44.454 81.862,45.275 ccw(c81.762,45.275) 81.762,45.375 cw(c81.762,45.462) 81.675,45.462 ; 81.675,45.488 cw(c81.762,45.488) 81.762,45.575 ; 81.786,45.575 ccw(c81.786,45.875) 82.086,45.875 ccw(c81.786,45.875) 81.862,46.165 81.862,49.087 82.037,49.262 82.064,49.289 82.134,49.359 cw(c82.205,49.289) 82.276,49.359 82.292,49.343 ccw(c82.363,49.413) 82.434,49.343 ccw(c82.363,49.413) 82.434,49.484 82.417,49.501 cw(c82.488,49.571) 82.417,49.642 cw(c82.488,49.571) 82.559,49.642 82.575,49.626 ccw(c82.646,49.696) 82.717,49.626 ccw(c82.646,49.696) 82.717,49.767 82.7,49.784 cw(c82.771,49.854) 82.7,49.925 82.775,50 v1(83.225,50)
DPHY_HS2_P: R2.1@78.5,40.675 U1.F7 | length 14.5
  Top Layer w0.1: R2.1@78.5,40.675 78.625,40.675 79.298,41.348 79.298,41.856 v1(79.191,41.962) ; U1.F7@82.7,51.475 v1(83.1,51.075)
  Bottom Layer w0.1: v1(79.191,41.962) 79.191,42.066 79.5,42.375 79.5,42.7 79.966,43.166 80.291,43.166 80.432,43.307 ; 80.451,43.326 80.71,43.585 cw(c80.941,43.776) 81.153,43.988 81.362,43.78 ccw(c81.433,43.85) 81.533,43.85 ccw(c81.433,43.85) 81.503,43.921 ; 81.475,45.462 ccw(c81.762,45.462) 81.662,45.193 81.662,44.537 81.487,44.362 ccw(c81.699,44.15) 81.487,43.938 ; 81.475,45.488 cw(c81.762,45.488) 81.762,45.775 ; 81.786,45.775 ccw(c81.786,45.875) 81.886,45.875 ccw(c81.786,45.875) 81.786,45.975 cw(c81.786,46.098) 81.662,46.098 81.662,49.17 83.1,50.608 v1(83.1,51.075)
DPHY_HS3_N: R5.1@83.85,40.625 U1.C6 | length 15.2
  Top Layer w0.1: U1.C6@83.7,48.475 83.7,48.816 83.641,48.875 83.559,48.875 83.3,48.616 83.3,45.859 83.063,45.621 83.063,45.115 cw(c82.763,45.115) 82.763,44.815 82.572,44.815 ccw(c82.572,44.715) 82.572,44.615 83.55,44.615 cw(c83.55,44.315) 83.85,44.315 cw(c83.55,44.315) 83.55,44.015 82.55,44.015 ccw(c82.55,43.915) 82.55,43.815 83.55,43.815 cw(c83.55,43.515) 83.85,43.515 cw(c83.55,43.515) 83.55,43.215 82.55,43.215 ccw(c82.55,43.115) 82.55,43.015 82.763,43.015 cw(c82.763,42.715) 83.063,42.715 83.063,42.35 83.063,41.212 83.325,40.95 83.525,40.95 R5.1@83.85,40.625
DPHY_HS3_P: R2.1@82.075,40.625 U1.D6 | length 15.5
  Top Layer w0.1: R2.1@82.075,40.625 82.454,41.004 82.639,41.004 82.863,41.228 82.863,42.35 82.863,42.715 ccw(c82.763,42.715) 82.763,42.815 82.55,42.815 cw(c82.55,43.115) 82.55,43.415 83.55,43.415 ccw(c83.55,43.515) 83.65,43.515 ccw(c83.55,43.515) 83.55,43.615 82.55,43.615 cw(c82.55,43.915) 82.55,44.215 83.55,44.215 ccw(c83.55,44.315) 83.65,44.315 ccw(c83.55,44.315) 83.55,44.415 82.572,44.415 cw(c82.572,44.715) 82.572,45.015 82.763,45.015 ccw(c82.763,45.115) 82.863,45.115 82.863,45.709 83.1,45.946 83.1,48.699 83.476,49.075 83.641,49.075 83.7,49.134 U1.D6@83.7,49.475
DPHY_HS_CLK_N: R5.1@87.415,40.625 U1.C5 | length 11.9
  Top Layer w0.1: v1(84.375,48.075) 84.7,48.4 U1.C5@84.7,48.475 ; v1(86.825,41.775) 86.825,41.71 86.61,41.495 86.61,41.215 86.825,41 87.04,41 R5.1@87.415,40.625
  Bottom Layer w0.1: v1(84.375,48.075) 84.15,47.85 84.15,46.913 85.294,45.769 ccw(c85.365,45.84) 85.435,45.769 85.452,45.785 cw(c85.523,45.715) 85.593,45.785 cw(c85.523,45.715) 85.593,45.644 85.577,45.628 ccw(c85.647,45.557) 85.577,45.486 ccw(c85.647,45.557) 85.718,45.486 85.735,45.503 cw(c85.805,45.432) 85.876,45.503 cw(c85.805,45.432) 85.876,45.361 85.86,45.345 ccw(c85.93,45.274) 85.86,45.203 85.93,45.133 86.072,44.991 86.121,44.941 86.192,44.871 86.194,44.869 86.61,44.453 86.61,43.862 cw(c86.31,43.862) 86.31,43.562 86.186,43.562 ccw(c86.186,43.462) 86.186,43.362 86.833,43.362 cw(c86.833,43.062) 87.133,43.062 cw(c86.833,43.062) 86.833,42.762 86.71,42.762 ccw(c86.71,42.662) 86.61,42.662 86.61,41.99 v1(86.825,41.775)
DPHY_HS_CLK_P: R2.1@85.615,40.6 U1.D5 | length 12.4
  Top Layer w0.1: v1(84.275,49.05) U1.D5@84.7,49.475 ; R2.1@85.615,40.6 86.015,41 86.175,41 86.41,41.235 86.41,41.515 v1(86.15,41.775)
  Bottom Layer w0.1: v1(84.275,49.05) 84.275,48.47 83.95,48.145 83.95,47.85 83.95,46.825 85.978,44.797 ; 85.98,44.8 86.41,44.37 86.41,43.862 cw(c86.31,43.862) 86.31,43.762 86.186,43.762 ccw(c86.186,43.462) 86.186,43.162 86.833,43.162 cw(c86.833,43.062) 86.933,43.062 cw(c86.833,43.062) 86.833,42.962 86.71,42.962 ccw(c86.71,42.662) 86.41,42.662 86.41,42.035 v1@86.175,41.8
DPHY_LP_CLK_N: R6.1@87.415,40.625 U1.B6 | length 9.5
  Top Layer w0.1: U1.B6@83.7,47.475 84.25,46.925 84.25,44.6 84.95,43.9 86.85,43.9 87.415,43.335 v1(87.415,41.85)
  Bottom Layer w0.1: R6.1@87.415,40.625 v1@87.415,41.865
DPHY_LP_CLK_P: R1.2@85.615,40.6 U1.A5 | length 6.3
  Top Layer w0.1: U1.A5@84.7,46.475 84.7,44.875 v1(85.325,44.25)
  Bottom Layer w0.1: v1(85.325,44.25) 85.325,40.89 R1.2@85.615,40.6
DPHY_LP_N0: R6.1@73.225,40.625 U1.B10 | length 11.5
  Top Layer w0.1: v1(76.125,44.775) 76.45,45.1 77.537,45.1 77.887,44.75 78.958,44.75 79.325,45.117 79.325,47.1 79.675,47.45 79.675,47.475 U1.B10@79.7,47.475
  Bottom Layer w0.1: R6.1@73.225,40.625 73.625,41.025 73.625,41.25 74.433,42.058 74.433,42.958 76.125,44.65 v1(76.125,44.775)
DPHY_LP_N1: R6.1@76.725,40.65 U1.E10 | length 14.4
  Top Layer w0.1: v1(79.225,50.025) 79.675,50.475 U1.E10@79.7,50.475
  Bottom Layer w0.1: R6.1@76.95,40.875 R6.1@76.725,40.65 76.325,41.05 75.775,41.05 75.05,41.775 v1(75.05,42.4) 75.466,42.816 75.916,42.816 76.407,43.307 77.71,43.307 79.541,45.139 79.541,49.634 79.225,49.95 v1(79.225,50.025)
DPHY_LP_N2: R6.1@80.3,40.65 U1.C7 | length 9.6
  Top Layer w0.1: v1(80.275,42.5) 80.275,42.433 80.479,42.229 v1(80.479,41.677) ; v1@82.225,48 U1.C7@82.7,48.475
  Bottom Layer w0.1: v1(80.275,42.5) 80.789,42.5 82.602,44.312 82.602,47.673 v1(82.25,48.025) ; R6.1@80.3,40.65 80.3,40.792 80.479,40.971 v1(80.479,41.677)
DPHY_LP_N3: R6.1@83.875,40.625 U1.B8 | length 9.3
  Top Layer w0.1: v1@81.4,42.1 81.4,42.225 81.275,42.35 81.275,47.05 U1.B8@81.7,47.475
  Bottom Layer w0.1: v1(81.429,42.127) 83.394,42.127 83.875,41.646 R6.1@83.875,40.625
DPHY_LP_P0: R1.2@71.4,40.625 U1.A8 | length 17.5
  Top Layer w0.1: v1(73.325,41.6) 73.65,41.6 74.857,42.807 76.282,42.807 76.375,42.9 79.35,42.9 80.05,42.2 80.05,41.5 80.25,41.3 81.187,41.3 81.825,41.938 81.825,42.525 81.7,42.65 U1.A8@81.7,46.475
  Bottom Layer w0.1: R1.2@71.4,40.625 71.758,40.983 71.758,41.258 72.1,41.6 v1(73.325,41.6)
DPHY_LP_P1: R1.2@74.925,40.65 U1.A10 | length 9.7
  Top Layer w0.1: v1(77.275,44.75) 77.525,44.5 79.025,44.5 79.7,45.175 U1.A10@79.7,46.475
  Bottom Layer w0.1: R1.2@74.925,40.65 74.7,40.875 74.7,42.686 76.764,44.75 v1(77.275,44.75)
DPHY_LP_P2: R1.2@78.5,40.675 U1.A6 | length 10.3
  Top Layer w0.1: U1.A6@83.7,46.475 83.7,45.45 84.05,45.1 v1@84.05,42.975
  Bottom Layer w0.1: R1.2@78.5,40.675 78.75,40.925 78.75,41.2 79.05,41.5 79.807,41.5 80.484,42.177 80.876,42.177 81.602,42.904 83.954,42.904 v1(84.05,43)
DPHY_LP_P3: R1.2@82.05,40.625 U1.A7 | length 6.1
  Top Layer w0.1: v1(82.05,41.425) 82.05,44.9 82.275,45.125 82.275,46.05 U1.A7@82.7,46.475
  Bottom Layer w0.1: R1.2@82.05,40.625 v1(82.05,41.425)
DSI_GPIO0: J1.22 U1.C8 | length 24.1
  Top Layer w0.1: v1@81.075,41.708 81.075,47.85 U1.C8@81.7,48.475 ; J1.22@85.975,31.5 85.975,34.094 86.256,34.375 v1(87.4,34.375)
  Bottom Layer w0.1: v1(81.05,41.708) 81.05,35.571 81.321,35.3 86.433,35.3 v1@87.379,34.354
DSI_GPIO1: J1.23 U1.C11 | length 34.3
  Top Layer w0.1: v1(74.3,34.85) 74.075,35.075 74.075,40.937 73.762,41.25 73.012,41.25 72.941,41.321 72.941,41.791 73.1,41.95 73.65,41.95 74.866,43.166 v1(75.675,43.166) ; U1.C11@78.7,48.475 78.775,48.475 78.775,48.438 79.137,48.075 v1(79.175,48.075) ; J1.23@86.475,31.5 v1(86.475,33.9)
  Bottom Layer w0.1: v1(74.3,34.85) 75.025,34.125 86.25,34.125 v1@86.525,33.85 ; v1(75.675,43.166) 76.016,43.507 77.627,43.507 79.175,45.055 v1(79.175,48.075)
DSI_GPIO2: J1.24 U1.A11 | length 36.5
  Top Layer w0.1: v1(78.3,45.225) 78.675,45.6 U1.A11@78.675,46.448 ; J1.24@86.975,31.5 v1@86.975,32.814
  Bottom Layer w0.1: v1(78.3,45.225) 78.275,45.25 77.95,45.25 77.8,45.4 75.796,45.4 73.071,42.675 72.005,42.675 70.125,40.795 70.125,34.867 71.267,33.725 84.125,33.725 85.003,32.847 v1(86.975,32.847)
DSI_GPIO3: J1.25 J1.26 U1.F9 | length 33.3
  Top Layer w0.1: v1(75.75,42.4) 75.831,42.4 76.035,42.196 77.151,42.196 77.65,41.697 v1(77.65,35.075) ; v1@80.25,51.025 U1.F9@80.7,51.475 ; J1.25@87.475,31.5 v1@87.475,32.789
  Bottom Layer w0.1: v1(75.75,42.4) 75.9,42.4 76.6,43.1 77.8,43.1 79.75,45.05 79.75,50.5 v1(80.25,51) ; v1(77.65,35.075) 86.1,35.075 87.475,33.7 v1(87.475,32.8)
DSI_RESET_N: J1.21 U1.C10 | length 37.5
  Top Layer w0.1: v1(78.8,45.175) 79.125,45.5 79.125,47.43 79.7,48.005 U1.C10@79.7,48.475 ; v1(85.125,33.45) 85.125,33.4 85.475,33.05 J1.21@85.475,31.5
  Bottom Layer w0.1: v1(78.8,45.175) 78.45,44.825 77.825,44.825 77.5,45.15 76.005,45.15 73.255,42.4 72.013,42.4 70.325,40.712 70.325,34.95 71.35,33.925 84.65,33.925 v1(85.125,33.45)
EEPROM_SCL: R47.1 U1.D11 U8.1 | length 21.1
  Top Layer w0.2: U8.1@66.175,36.2 67.075,36.2 68,37.125 68,38.675 74.7,45.375 76.925,45.375 v1(77.35,45.8) ; U1.D11@78.7,49.475 v1(79.191,48.984)
  Bottom Layer w0.2: v1(77.35,45.8) 77.35,47.776 78.124,48.55 78.704,48.55 79.137,48.984 v1(79.191,48.984)
EEPROM_SDA: R48.1 U1.D12 U8.3 | length 18.1
  Top Layer w0.2: U8.3@66.175,38.1 66.825,38.1 74.5,45.775 v1(76.6,45.775) ; U1.D12@77.7,49.475 v1(78.1,49.075)
  Bottom Layer w0.2: v1(76.6,45.775) 77.05,46.225 77.05,47.9 78.075,48.925 78.075,49.05 v1(78.1,49.075)
GND: C1.1 C3.1 C4.1 C5.1 C6.1 C7.1 C8.1 C9.1 C10.1 C11.1 C12.1 C13.1 C14.1 C15.1 C16.2 C17.1 C18.1 C21.1 C22.1 C23.1 C24.1 C25.1 C26.1 C27.1 C28.1 C29.1 C30.2 C32.1 C34.1 C35.1 C39.1 C40.1 C41.1 C42.1 C43.1 C44.1 C45.1 C46.1 C50.1 C51.1 C52.1 C53.1 C54.1 C55.1 C56.1 C57.1 C58.1 C59.1 C60.1 C61.1 C62.1 C63.1 C64.1 C65.1 C66.1 C67.1 C68.1 C69.1 C70.1 C71.1 C72.1 C73.1 C74.1 C75.1 C76.1 C77.1 C78.1 C79.1 C?.2 D7.2 J1.1 J1.4 J1.7 J1.10 J1.13 J1.16 J1.17 J1.18 J1.19 J1.20 J1.28 J1.MP1 J1.MP2 OSC1.2 OSC2.2 P1.1 P2.12 P2.30 P4.2 P4.5 P4.8 P4.11 P4.17 R3.1 R4.2 R8.1 R9.1 R10.1 R11.1 R13.2 R17.2 R19.2 R21.2 R25.1 R26.1 R27.1 R28.1 R29.1 R30.1 R31.1 R33.1 R42.1 R44.1 R49.2 R62.1 R70.1 R75.1 R76.1 R77.1 R78.1 R79.1 R80.1 R81.1 R82.1 R?.2 T1.2 U1.A1 U1.A16 U1.B7 U1.B11 U1.D4 U1.D13 U1.E9 U1.G2 U1.G8 U1.G15 U1.H7 U1.H9 U1.H12 U1.J5 U1.J8 U1.K7 U1.K9 U1.L2 U1.L15 U1.M8 U1.N11 U1.N13 U1.P3 U1.P14 U1.R6 U1.R10 U1.T1 U1.T16 U2.4 U4.2 U4.29 U5.2 U6.2 U7.A9 U7.B1 U7.B3 U7.B9 U7.D1 U7.D8 U7.E1 U7.E2 U7.E8 U7.F9 U7.G1 U7.G8 U7.G9 U7.J2 U7.J8 U7.M1 U7.M9 U7.P1 U7.P9 U7.T1 U7.T9 U8.2 U9.65 U10.3 U10.5 U10.8 U10.11 U10.14 U10.25 U10.28 U10.31 U10.34 U10.36 U15.A1/B12 U15.B1/A12 U.2 U.4 U.9 U.15 U.18 U.25 | length 45.2
  Top Layer w0.2: v1(33.1,57.35) P4.8@35.3,57.35 ; v1(33.1,58.85) P4.11@35.3,58.85 ; v1@33.125,54.35 P4.2@35.3,54.35 ; v1(40.475,55.85) U10.31@41.85,55.85 ; v1(40.475,58.825) 40.5,58.85 U10.25@42.045,58.85 ; v1(40.5,53.35) U10.36@41.875,53.35 ; v1(40.5,54.35) U10.34@41.875,54.35 ; v1(40.525,57.35) U10.28@41.875,57.35 U10.28@42,57.35 ; U10.3@47.375,53.35 v1@48.6,53.35 ; U10.5@47.375,54.35 v1(48.6,54.35) ; U10.8@47.375,55.85 v1@48.7,55.85 ; U10.11@47.375,57.35 v1(48.6,57.35) ; U10.14@47.375,58.85 v1(48.575,58.85) ; U8.2@66.175,37.15 67.1,37.15 v1(67.225,37.275) ; v1(73.275,61.9) U1.T16@73.7,61.475 ; v1@73.3,46.075 U1.A16@73.7,46.475 ; v1(74.225,56.025) 74.25,56.025 U1.L15@74.7,56.475 ; U1.G15@74.7,52.475 74.75,52.475 v1(75.2,52.925) ; v1(75.475,30.375) J1.1@75.475,31.5 ; U1.P14@75.7,59.475 v1(76.175,59) ; v1(76.275,49.05) U1.D13@76.7,49.475 ; U1.N13@76.7,58.475 77.15,58.025 v1@77.166,58.025 ; v1@76.975,30.35 J1.4@76.975,31.5 ; v1@77.25,53.042 77.267,53.042 U1.H12@77.7,53.475 ; v1(78.275,47.9) U1.B11@78.7,47.475 ; v1@78.475,30.3 J1.7@78.475,31.5 ; U1.N11@78.7,58.475 79.175,58 v1@79.191,58 ; v1(79.275,60.05) U1.R10@79.7,60.475 ; v1@79.975,30.25 J1.10@79.975,31.5 ; v1(80.275,50.075) 80.675,50.475 U1.E9@80.7,50.475 ; U1.H9@80.7,53.475 80.725,53.475 v1(81.175,53.925) ; U1.K9@80.7,55.475 U1.J8@81.7,54.475 U1.K7@82.7,55.475 ; v1(81.175,56.975) 81.675,57.475 U1.M8@81.7,57.475 ; v1(81.316,52.05) 81.7,52.434 U1.G8@81.7,52.475 ; v1(81.475,30.275) J1.13@81.475,31.5 ; v1(82.252,47) 82.252,47.027 U1.B7@82.7,47.475 ; v1(82.35,53.075) 82.7,53.425 U1.H7@82.7,53.475 ; U1.R6@83.7,60.475 83.7,60.543 83.925,60.768 v1(83.925,60.975) ; U1.J5@84.7,54.475 v1(85.15,54.025) ; v1(85.25,49.075) 85.65,49.475 U1.D4@85.7,49.475 ; v1(86.25,59.05) 86.675,59.475 U1.P3@86.7,59.475 ; v1(87.275,56.1) 87.65,56.475 U1.L2@87.7,56.475 ; v1(87.325,52.1) U1.G2@87.7,52.475 ; U1.A1@88.7,46.475 v1(89.075,46.1) ; U1.T1@88.7,61.475 88.742,61.475 v1(89.092,61.825)
  other v1: 79.95,30.225 78.475,30.275 76.95,30.325 104.475,38.775 73.275,46.075 77.275,53.025 48.6,53.375 33.125,54.325 82.2,54.975 81.175,55 48.6,55.875 79.191,57.975 77.175,58.016
  other v2: 40.75,33.35 41.85,33.35 42.95,33.35 40.75,34.45 41.85,34.45 42.95,34.45 40.75,35.55 41.85,35.55 42.95,35.55
GPIO0_N: P2.2 U1.P9 | length 5.2
  Top Layer w0.1: v1(80.25,59.925) U1.P9@80.7,59.475
  Bottom Layer w0.1: v1(80.25,59.925) 80.259,59.916 80.259,59.575 80.321,59.512 80.404,59.512 80.6,59.709 80.6,63.3 80.725,63.425
GPIO0_P: P2.1 U1.N9 | length 5.3
  Top Layer w0.1: v1(80.275,58.9) U1.N9@80.7,58.475
  Bottom Layer w0.1: v1(80.275,58.9) 80.262,58.912 80.262,59.254 80.321,59.312 80.487,59.312 80.8,59.626 80.8,63.217 80.866,63.284